# Altium PCB AMP_PCB.PcbDoc
Units mm, origin at the board's own origin, x right, y up, seen from the top; angles counter-clockwise.
Board outline 60.45 x 34.54 mm, 4 copper layers (Top Layer, VCC, GND, Bottom Layer), stack 1.57 mm thick; 46 components, 25 nets, 136 pads, 162 vias.
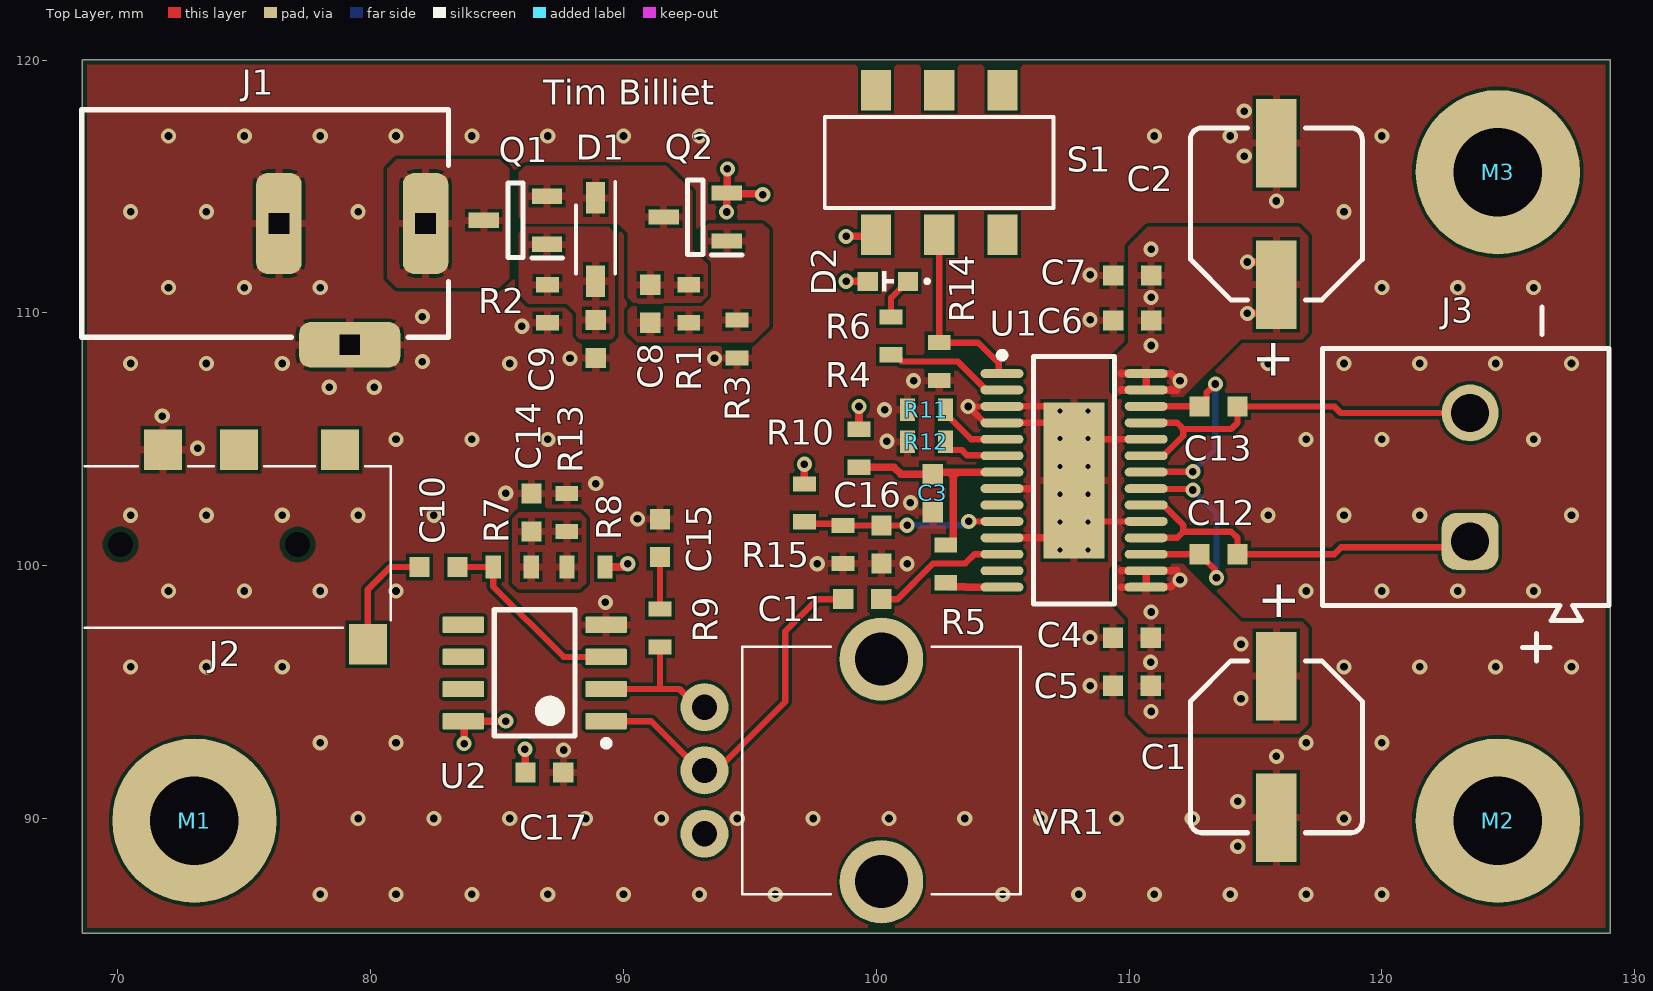
[diagram p0: Top Layer view]
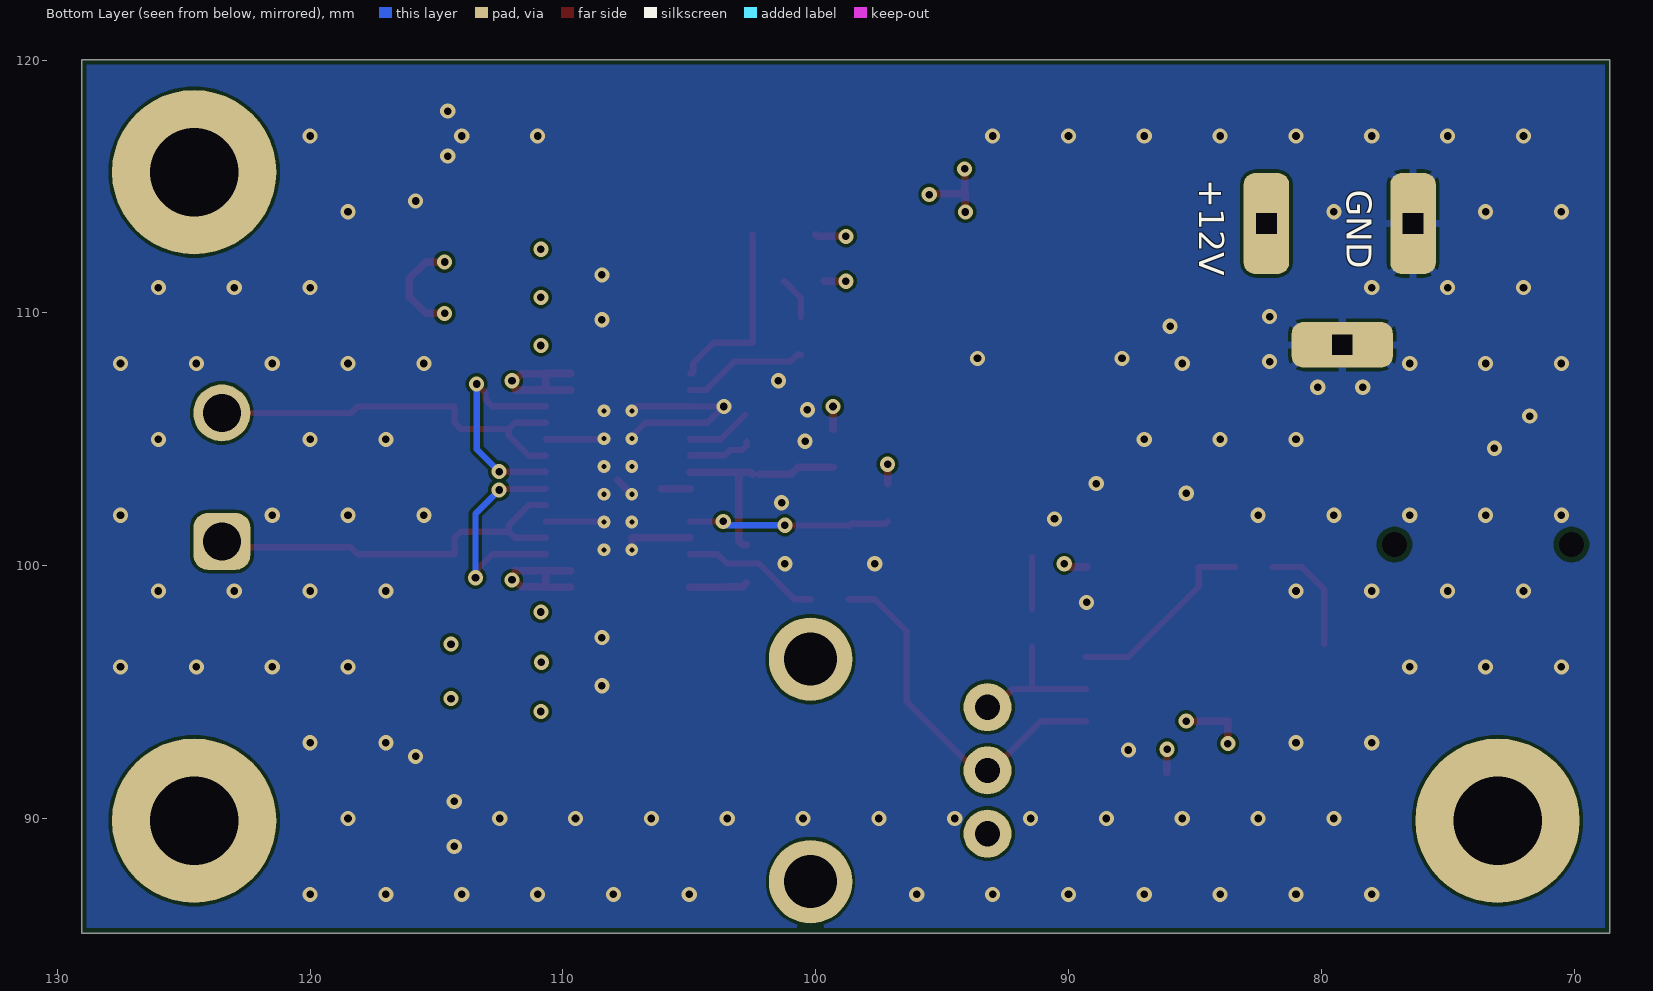
[diagram p1: Bottom Layer view, seen from below]
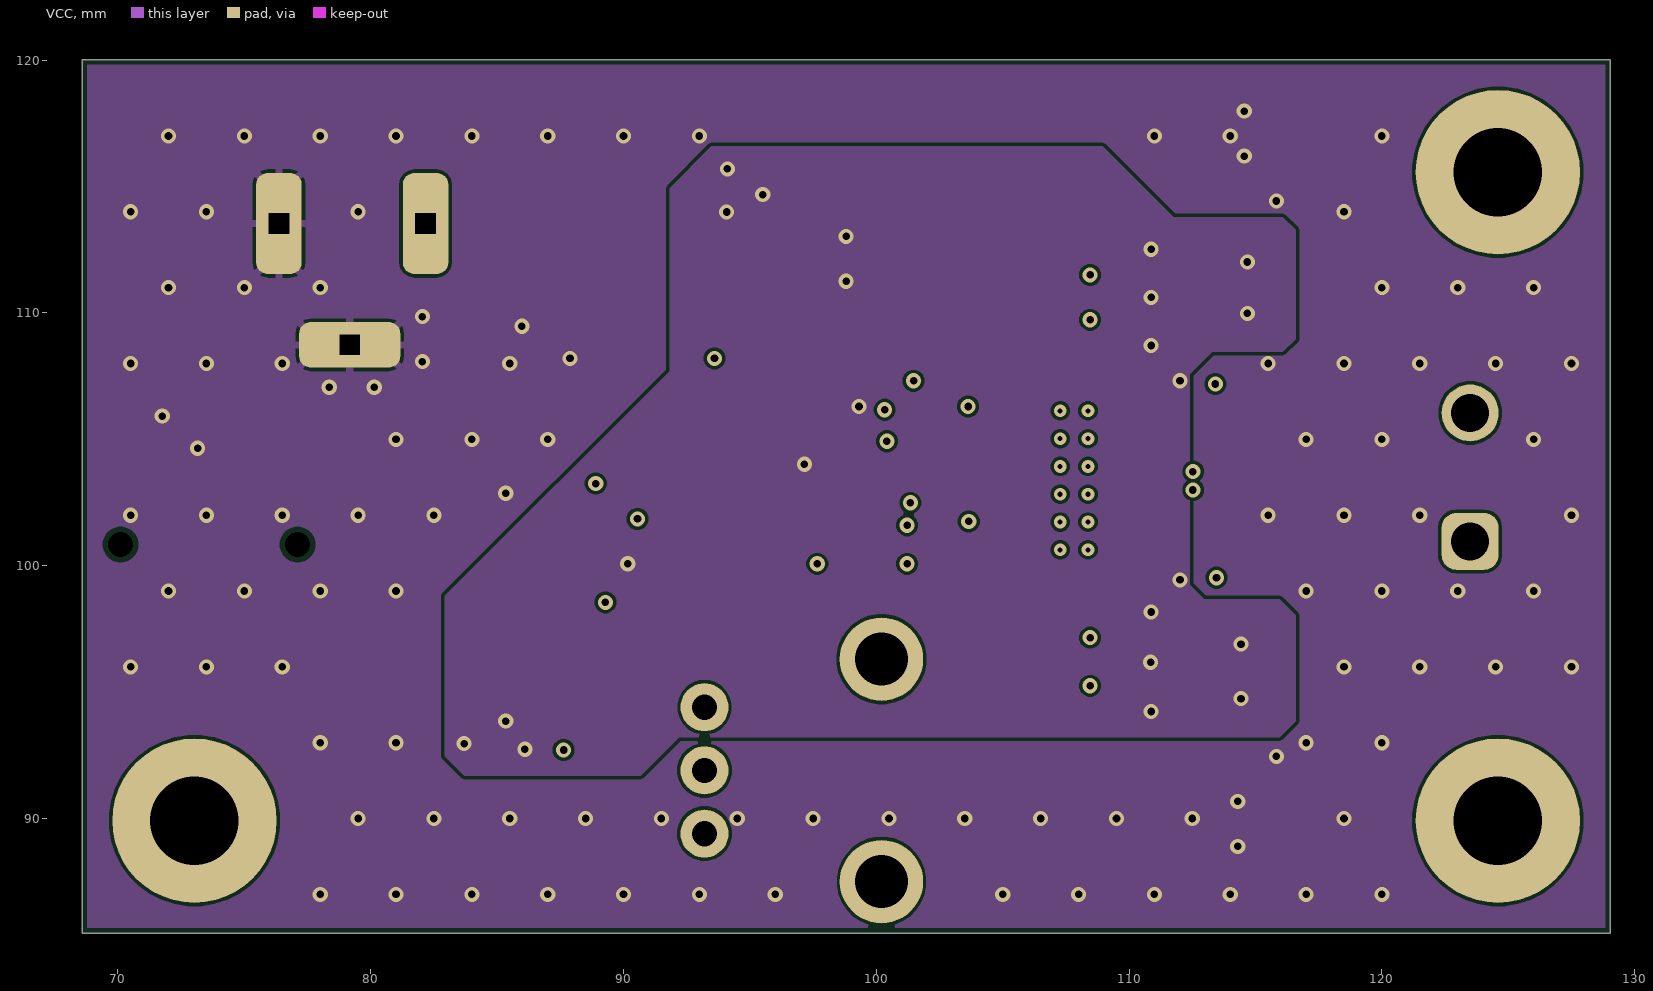
[diagram p2: VCC]
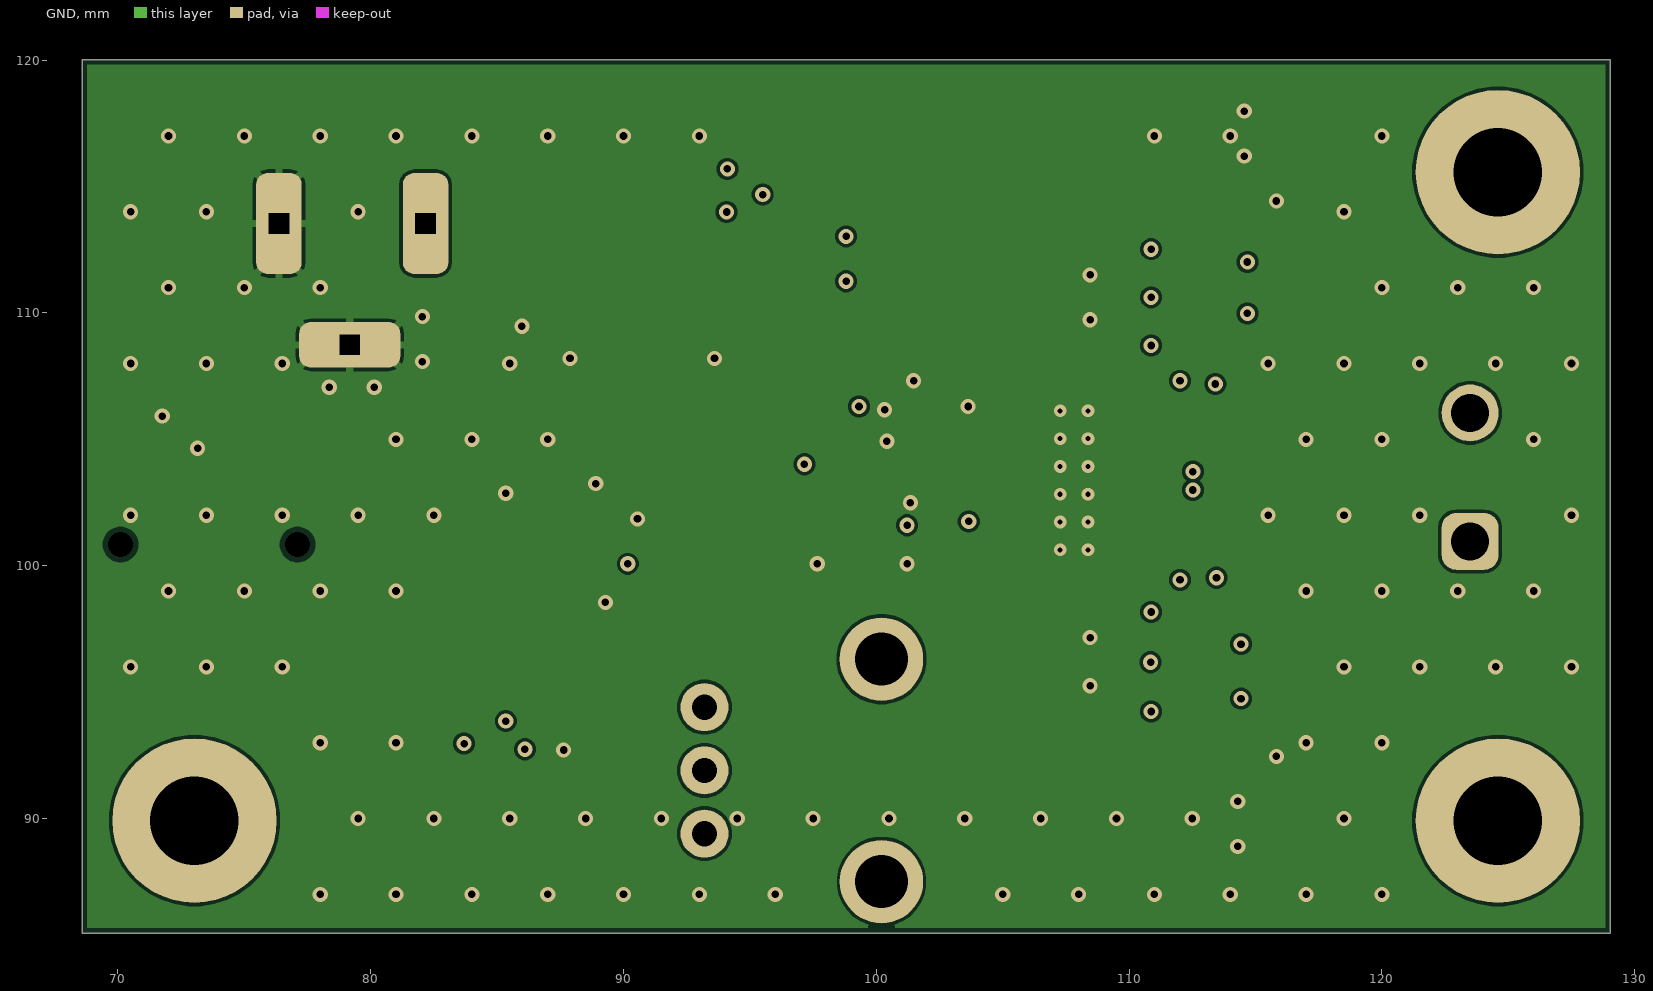
[diagram p3: GND]
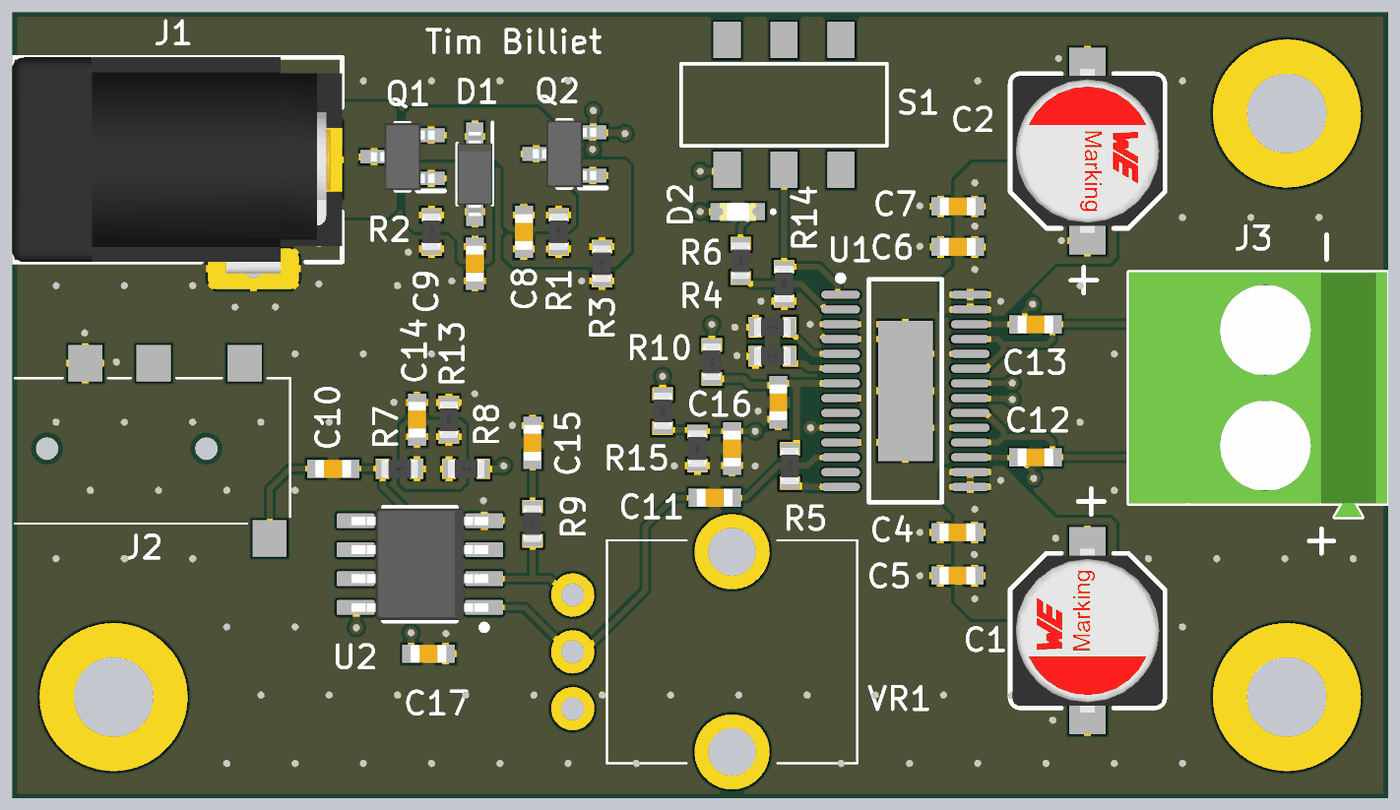
[diagram p4: 3D render of the assembled board from above, using the file's embedded part models]

## Layer stack, top to bottom
Top Solder: solder mask 0.0127, Solder Resist, Dk 3.8
Top Layer: signal copper 0.035
Dielectric 1: prepreg 0.2, 7628, Dk 4.6
VCC: signal copper 0.0175
Core: core 1.065, FR-4, Dk 4.5
GND: signal copper 0.0175
Dielectric 2: prepreg 0.2, 7628, Dk 4.6
Bottom Layer: signal copper 0.035
Bottom Solder: solder mask 0.0127, Solder Resist, Dk 3.8

## Board outline
68.58,85.471 68.58,120.015 129.032,120.015 129.032,85.471

## Design rules (kind name [scope] priority, off if disabled: settings)
BoardOutlineClearance [All] p1: gap=0.2 ignorepadtopadclearanceinfootprint=FALSE
Clearance [All] p1: gap=0.127 ignorepadtopadclearanceinfootprint=FALSE except(0.2: Arc-Hole Track-Hole SMDPad-Hole THPad-Hole Via-Hole Fill-Hole Poly-Hole Region-Hole Text-Hole)
ComponentClearance [All] p1: gap=0.127 collisioncheckmode=3 verticalgap=0.127 showdistances=TRUE
DiffPairsRouting [All] p1: maxlimit=0.254 minlimit=0.127 mostfreqgap=0.254 toplayer_prefgap=0.127 toplayer_minwidth=0.127 toplayer_maxwidth=25.4 toplayer_prefwidth=0.127 midlayer1_mingap=0.254 midlayer1_minwidth=0.381 midlayer1_maxwidth=0.381 midlayer1_prefwidth=0.381 midlayer2_mingap=0.254 midlayer2_minwidth=0.381 midlayer2_maxwidth=0.381 midlayer2_prefwidth=0.381 bottomlayer_prefgap=0.127 bottomlayer_minwidth=0.127 bottomlayer_maxwidth=25.4 bottomlayer_prefwidth=0.127 maxuncoupledlength=12.7
Height [All] p1: minheight=0 maxheight=1816.048 prefheight=12.7
HoleSize [All] p1: absolutevalues=TRUE maxlimit=6.3 minlimit=0.15 maxpercent=80.000 minpercent=20.000
HoleToHoleClearance [All] p1: gap=0.25 allowstackedmicrovias=FALSE
MinimumAnnularRing [All] p1: minimumring=0.075
MinimumSolderMaskSliver [All] p1: minsoldermaskwidth=0
PlaneClearance [All] p1: clearance=0.127
PlaneConnect PlaneConnectPowerPads [InPadClass('PowerPads')] p1: planeconnectstyle=Direct reliefexpansion=0.508 reliefentries=4 reliefconductorwidth=0.254 reliefairgap=0.254
PlaneConnect [All] p2: pad.planeconnectstyle=Relief pad.reliefexpansion=0.3 pad.reliefentries=4 pad.reliefconductorwidth=0.127 pad.reliefairgap=0.127 via.planeconnectstyle=Direct via.reliefexpansion=0.3 via.reliefentries=4 via.reliefconductorwidth=0.127 via.reliefairgap=0.127
PolygonConnect PolygonConnectPowerPads [All vs (InPadClass('PowerPads'))] p1: connectstyle=Direct reliefconductorwidth=0.254 reliefentries=4 polygonreliefangle="90 Angle" airgapwidth=0.254
PolygonConnect [All] p2: thpad.connectstyle=Relief thpad.reliefconductorwidth=0.3 thpad.reliefentries=4 thpad.polygonreliefangle="90 Angle" thpad.airgapwidth=0.127 thpad.conductorbypadedge=TRUE thpad.mindistance=0.381 thpad.enablemindistance=FALSE smdpad.connectstyle=Relief smdpad.reliefconductorwidth=0.3 smdpad.reliefentries=4 smdpad.polygonreliefangle="90 Angle" smdpad.airgapwidth=0.127 smdpad.conductorbypadedge=TRUE smdpad.mindistance=0.381 smdpad.enablemindistance=FALSE via.connectstyle=Direct via.reliefconductorwidth=0.127 via.reliefentries=4 via.polygonreliefangle="90 Angle" via.airgapwidth=0.127
RoutingVias [All] p1: holewidth=0.3 width=0.6 viastyle="Through Hole" minholewidth=0.3 minwidth=0.6 maxholewidth=0.6 maxwidth=6.6
SilkToSilkClearance [All] p1: silktosilkclearance=0
SilkToSolderMaskClearance [IsPad] p1: minsilkscreentomaskgap=0.127 clearancetoexposedcopper=TRUE
SolderMaskExpansion SolderMaskExpansionVia [isVia] p1: expansion=0.102 istentingtop=TRUE
SolderMaskExpansion [All] p2: expansion=0.075 istentingtop=FALSE useseparateexpansions=TRUE expansionbottom=0.075 istentingbottom=FALSE
SupplyNets "Schematic Supply Nets_2" [InNet('VCC')] p1: voltage=0.000
SupplyNets "Schematic Supply Nets" [InNet('AVCC')] p2: voltage=0.000
SupplyNets "Schematic Supply Nets_4" [InNet('GND')] p3: voltage=0.000
Width [All] p1: maxlimit=25.4 minlimit=0.127 preferedwidth=0.127 midlayer1_maxwidth=0.254 midlayer2_maxwidth=0.254 minimp=50.000000 maximp=50.000000 favimp=50.000000
20 further rules are at their usual default settings.

## Components (designator, comment, footprint, x,y, rotation, side; value= is the part's Value field where it differs from the comment)
C1 "ROQANG RVT1V101M0607" "WURTH D6.3X7.7MM" 115.824,92.837 r90 top value="100uF 35V"
C2 "ROQANG RVT1V101M0607" "WURTH D6.3X7.7MM" 115.824,113.919 r270 top value="100uF 35V"
C3 "Capacitor 1uF 0603" "WURTH 0603 CAPACITOR" 102.235,102.87 r90 top value=1uF
C4 "Capacitor 1nF 0603" "WURTH 0603 CAPACITOR" 110.109,97.155 r0 top value=1nF
C5 "Capacitor 100nF 0603 50V" "WURTH 0603 CAPACITOR" 110.109,95.25 r0 top value=100nF
C6 "Capacitor 1nF 0603" "WURTH 0603 CAPACITOR" 110.122,109.705 r0 top value=1nF
C7 "Capacitor 100nF 0603 50V" "WURTH 0603 CAPACITOR" 110.122,111.483 r0 top value=100nF
C8 "Capacitor 1uF 0603" "WURTH 0603 CAPACITOR" 91.059,110.363 r90 top value=1uF
C9 "Capacitor 15nF 0603" "WURTH 0603 CAPACITOR" 88.9,108.966 r90 top value=15nF
C10 "Capacitor 1uF 0603" "WURTH 0603 CAPACITOR" 82.677,99.949 r180 top value=1uF
C11 "Capacitor 1uF 0603" "WURTH 0603 CAPACITOR" 99.441,98.679 r180 top value=1uF
C12 "Capacitor 470nF 0603 50V" "WURTH 0603 CAPACITOR" 113.538,100.457 r0 top value=470nF
C13 "Capacitor 470nF 0603 50V" "WURTH 0603 CAPACITOR" 113.538,106.299 r0 top value=470nF
C14 "Capacitor 4.7uF 0603" "WURTH 0603 CAPACITOR" 86.36,102.108 r270 top value=4.7uF
C15 "Capacitor 1uF 0603" "WURTH 0603 CAPACITOR" 91.44,101.092 r90 top value=1uF
C16 "Capacitor 1uF 0603" "WURTH 0603 CAPACITOR" 100.203,100.838 r90 top value=1uF
C17 "Capacitor 100nF 0603 50V" "WURTH 0603 CAPACITOR" 86.868,91.821 r180 top value=100nF
D1 "BZT52B15V" SOD-123 88.9,112.903 r270 top
D2 "Red, 2V, 140°" "WURTH 0603 LED" 100.457,111.252 r180 top
J1 "694108301002" 694108301002 75.819,113.538 r270 top
J2 "SHOU HAN PJ-320D" "SHOU HAN PJ-320D" 68.484,100.738 r0 top
J3 "691236510002" 691236510002 123.317,103.505 r90 top
M1 "Mounting hole" "M3 hole"#1 73.025,90.805 r0 top
M2 "Mounting hole" "M3 hole"#2 124.206,91.948 r0 top
M3 "Mounting hole" "M3 hole"#3 123.952,115.57 r0 top
Q1 "AO3407" "UMW SOT23-3" 85.725,113.665 r180 top
Q2 "AO3407" "UMW SOT23-3" 92.837,113.792 r180 top
R1 "Resistor 27k 0603" "WURTH 0603 RESISTOR" 92.583,110.363 r90 top value=27k
R2 "Resistor 10k 0603" "WURTH 0603 RESISTOR" 86.995,110.363 r90 top value=10k
R3 "Resistor 2k2 0603" "WURTH 0603 RESISTOR" 94.488,108.966 r90 top value=2k2
R4 "Resistor 10R 0603" "WURTH 0603 RESISTOR" 99.314,104.648 r270 top value=10R
R5 "Resistor 100k 0603" "WURTH 0603 RESISTOR" 102.743,100.076 r270 top value=100k
R6 "Resistor 2k2 0603" "WURTH 0603 RESISTOR" 100.584,109.093 r90 top value=2k2
R7 "Resistor 220k 0603" "WURTH 0603 RESISTOR" 85.598,99.949 r180 top value=220k
R8 "Resistor 33k 0603" "WURTH 0603 RESISTOR" 88.519,99.949 r0 top value=33k
R9 "Resistor 2k2 0603" "WURTH 0603 RESISTOR" 91.44,97.536 r270 top value=2k2
R10 "Resistor 16k2 0603" "WURTH 0603 RESISTOR" 97.155,102.489 r90 top value=16k2
R11 "Resistor 0R 0603" "WURTH 0603 RESISTOR" 101.981,106.172 r0 top value=0R
R12 "Resistor 0R 0603" "WURTH 0603 RESISTOR" 101.981,104.902 r0 top value=0R
R13 "Resistor 33k 0603" "WURTH 0603 RESISTOR" 87.757,102.108 r270 top value=33k
R14 "Resistor 33k 0603" "WURTH 0603 RESISTOR" 102.489,108.077 r90 top value=33k
R15 "Resistor 2k2 0603" "WURTH 0603 RESISTOR" 98.679,100.838 r90 top value=2k2
S1 "MST22D18G2 125" "SHOU HAN MST22D18G2 125 SWITCH" 102.489,115.951 r180 top
U1 "TPA3111D1PWPR" TI-PWP28-5720X1950TP_N 107.823,103.378 r0 top
U2 "TL072CD" D0008A_M 86.487,95.758 r180 top
VR1 "ALPSALPINE RK09K11300DR" "ALPSALPINE RK09K11300DR" 93.203,91.903 r270 top value=10k

## Footprints (in the part's own frame and the unit in brackets; to place one, negate y for a bottom-side part, rotate by r counter-clockwise, add the part's x,y. Pads: shape width x height; smd on the part's side, far side on the other; paste and mask are expansions set on the pad)
691236510002 [mm] "Horizontal Cable Entry with Rising Cage Clamp, pitch 5.08mm, 02p"
  rrect50% 2.25x2.25 hole 1.5: 1(-2.54,-0.175)
  round 2.25 hole 1.5: 2(2.54,-0.175)
  silkscreen extent -5.68,-5.68 5.08,5.68, body extent -5.68,-5.67 5.08,5.68, height 18.1
694108301002 [mm] "DC Power Jack Right Angled(6.4)"
  rrect50% 4x1.8 hole 0.8 square: 1(0,6.35) 2(0,0.55)
  rrect50% 1.8x4 hole 0.8 square: 3(4.8,3.35)
  silkscreen extent -4.5,-7.25 4.5,7.25, body extent -4.5,-7.25 5,7.25, height 10.75
"ALPSALPINE RK09K11300DR" [mm] "10k vertical potentiometer"
  round 1.9 hole 1: 1(-2.5,0) 2(0,0) 3(2.5,0)
  round 3.3 hole 2.1: 4(-4.4,7) 5(4.4,7)
  silkscreen extent -4.9,1.5 4.9,12.5
D0008A_M [mm] "SOIC, 8-Leads, Body 5x4mm, Pitch 1.27mm, IPC Low Density"
  rrect15% 1.65x0.65 smd: 1(-2.825,1.905) 2(-2.825,0.635) 3(-2.825,-0.635) 4(-2.825,-1.905) 5(2.825,-1.905) 6(2.825,-0.635) 7(2.825,0.635) 8(2.825,1.905)
  silkscreen extent -2.95,-2.5 1.6,2.9, body extent -3,-2.45 3,2.45, height 1.63
"M3 hole"#1 [mm]
  round 6.5 hole 3.5: 1(0,-0.889)
"M3 hole"#2 [mm]
  round 6.5 hole 3.5: 1(0.381,-2.032)
"M3 hole"#3 [mm]
  round 6.5 hole 3.5: 1(0.635,0)
"SHOU HAN MST22D18G2 125 SWITCH" [mm]
  rect 1.2x1.6 smd: 1(-2.5,2.85) 2(0,2.85) 3(2.5,2.85) 4(-2.5,-2.85) 5(0,-2.85) 6(2.5,-2.85)
  silkscreen extent -4.52,-1.8 4.53,1.8
"SHOU HAN PJ-320D" [mm] "3.5mm jack"
  rect 1.5x1.6 smd: 1(11.4,-3.85) 2(10.3,3.85) 3(6.3,3.85) 4(3.3,3.85)
  round 0 hole 1 unplated: 14(1.62,0.1) 14(8.62,0.1)
  silkscreen extent 0.2,-3.2 12.3,3.2
SOD-123 [mm]
  rect 1.25x0.75 smd: 1(-1.65,0) 2(1.65,0)
  silkscreen extent -2.27,-0.77 1.35,0.77, body extent -1.85,-0.77 1.85,0.77, height 1.35
TI-PWP28-5720X1950TP_N [mm] "SOP, 28-Leads, Body 9.8x4.5mm, Pitch 0.65mm, Thermal Pad 6.17x2.4mm, IPC Medium Density"
  oval 1.7x0.35 smd: 1(-2.85,4.225) 2(-2.85,3.575) 3(-2.85,2.925) 4(-2.85,2.275) 5(-2.85,1.625) 6(-2.85,0.975) 7(-2.85,0.325) 8(-2.85,-0.325) 9(-2.85,-0.975) 10(-2.85,-1.625) 11(-2.85,-2.275) 12(-2.85,-2.925) 13(-2.85,-3.575) 14(-2.85,-4.225) 15(2.85,-4.225) 16(2.85,-3.575) 17(2.85,-2.925) 18(2.85,-2.275) 19(2.85,-1.625) 20(2.85,-0.975) 21(2.85,-0.325) 22(2.85,0.325) 23(2.85,0.975) 24(2.85,1.625) 25(2.85,2.275) 26(2.85,2.925) 27(2.85,3.575) 28(2.85,4.225)
  rect 2.4x6.17 smd: 29(0,0)
  silkscreen extent -2.97,-4.9 1.6,5.07, body extent -2.25,-4.9 2.25,4.9, height 1.2
"UMW SOT23-3" [mm]
  rect 1.2x0.6 smd: 1(-1.25,0.95) 2(-1.25,-0.95) 3(1.25,0)
  silkscreen extent -1.85,-1.48 0.3,1.5, body extent -1.4,-1.48 1.4,1.48, height 1.25
"WURTH 0603 CAPACITOR" [mm] "Ceramic Capacitors, body 1.6x0.8mm"
  rect 0.8x0.8 smd: 1(-0.75,0) 2(0.75,0)
  body extent -0.8,-0.4 0.8,0.4, height 0.8
"WURTH 0603 LED" [mm] "SMD Mono-color Chip LED, body 1.6x0.8mm"
  rect 0.8x0.75 smd: 1(-0.8,0) 2(0.8,0)
  silkscreen extent -1.63,-0.4 0.22,0.4, body extent -0.8,-0.4 0.8,0.4, height 0.42
"WURTH 0603 RESISTOR" [mm] "Fixed Thick Film, body 1.60 x 0.80 mm"
  rect 0.6x0.9 smd paste-0.028 mask+0.1: 1(-0.75,0) 2(0.75,0)
  body extent -0.8,-0.4 0.8,0.4, height 0.45
"WURTH D6.3X7.7MM" [mm] "Aluminum Hybrid Polymer Capacitor, SMT, body diameter 6.3mm"
  rect 3.5x1.6 smd: 1(2.8,0) 2(-2.8,0)
  silkscreen extent -3.4,-3.4 3.4,3.4, body extent -3.6,-3.3 3.6,3.3, height 7.75

## Part data
C1 C2: library part "100uF 35V SMD", "SMD,D6.3xL7.7mm"
D1: library part "YONGYUTAI BZT52B15"
D2: library part "LED RED 0603", "WL-SMCD Mono-color Chip LED Diffused, SMT, size 0603, Red, 2V, 140°", Case/Size Code=0603, Emitting Color=Red, Forward Voltage=2V, Manufacturer="Wurth Elektronik", Manufacturer Part Number=150060RS55040, Operating Temperature Max=85°C, Operating Temperature Min=-40°C, Category="Signal LEDs", Chip Technology=AlInGaP, ComponentLink1Description="Website Link", ComponentLink1URL=https://www.we-online.com/redexpert/article/150060RS55040?ad, ComponentLink2Description="Datasheet Link", ComponentLink2URL=https://www.we-online.com/redexpert/spec/150060RS55040?ad, Dominant Wavelength=624nm, Height=0.4mm, Length=1.6mm, Luminous Intensity=90mcd, Match Code=WL-SMCD, Mount="Surface Mount", Packaging="Tape and Reel", Peak Wavelength=632nm, Viewing Angle=140°, Width=0.8mm
J1: library part CMP-1502-00190-4, "DC Power Jack Connector WR-DC, Male, Right Angled, THT, 5 A, 24 V", Color=Black, Current Rating=5A, Flammability Rating="UL94 V-0", Insulation Resistance=100MΩ, Max Operating Temperature=85°C, Min Operating Temperature=-40°C, Operating Supply Voltage=24V, Voltage Rating=30V, Connector Type=Power, Contact Gender=Female, Contact Material="Gold, Tin", Contact Plating=Tin, Gender=Male, Height=11mm, Housing Material=Polyamide, Mount="Through Hole", Number of Contacts=3, Packaging=Bulk, REACH SVHC=Unknown, RoHS=Compliant, Shielding=Unshielded, Termination="Through Hole"
J2: library part "3.5mm headphone jack smd"
J3: library part CMP-1502-02613-3, "Terminal Block, Wtb, 2Way, 30-12Awg Rohs Compliant: Yes", Current Rating=20A, Max Operating Temperature=120°C, Min Operating Temperature=-30°C, Voltage Rating=300V, Height=18.1mm, Lead Pitch=5.08mm, Number of Contacts=2, Number of Pins=2, Number of Rows=1, Packaging=Box, RoHS=Compliant
Q1 Q2: library part "UMW AO3407A", "MOSFET (P-Channel)", Arrow Part Number=AO3407A, Manufacturer_Name="Alpha & Omega Semiconductors", Arrow Price/Stock=https://www.arrow.com/en/products/ao3407a/alpha-and-omega-semiconductor?region=nac, Datasheet Link=http://www.aosmd.com/pdfs/datasheet/ao3407a.pdf, Height=1.25mm, Manufacturer_Part_Number=AO3407A
S1: library part "SHOU HAN MST22D18G2 125"
U1: library part CMP-0994-00250-2, "None", Case/Package=HTSSOP, Max Operating Temperature=85°C, Max Output Power=10W, Max Supply Voltage=26V, Min Operating Temperature=-40°C, Min Supply Voltage=8V, Nominal Supply Current=40mA, Package Quantity=2000, Power Dissipation=4.98W, Voltage Gain=36dB, Gain=37dB, Lead Free="Lead Free", Load Impedance=8R, Number of Channels=1, Number of Pins=28, Output Power=10W, Packaging="Tape and Reel", Radiation Hardening=No, REACH SVHC="No SVHC", RoHS Compliant=Yes, Series=SpeakerGuard™, Supply Current=40mA
U2: library part CMP-0017-00467-2, "Dual Low-Noise JFET-Input General-Purpose Operational Amplifier, 7 to 36 V, 0 to 70 degC, 8-pin SOIC (D8), Green (RoHS & no Sb/Br)", Manufacturer="Texas Instruments", Rating=Catalog, Total Supply Voltage(Max)(+5V is 5, +/-5V is 10)=36, Total Supply Voltage(Min)(+5V is 5, +/-5V is 10)=7, CMRR(Min)(dB)=70, Code_JEDEC=MS-012, ComponentLink1Description="Manufacturer URL", ComponentLink1URL=http://www.ti.com/, ComponentLink2Description=Datasheet, ComponentLink2URL=http://www.ti.com/lit/ds/symlink/tl072.pdf, ComponentLink3Description="Package Specification", ComponentLink3URL=http://www.ti.com/litv/pdf/msoi002j, DatasheetVersion=SLOS080J, Eco-Plan="Green (RoHS & no Sb/Br)", GBW(Typ)(MHz)=3, IIB(Max)(pA)=200, Iq per channel(Max)(mA)=2.5, Mounting Technology="Surface Mount", Number of Channels=2, Offset Drift(Typ)(uV/C)=18, PackageDescription="8-Pin Plastic Small Outline, Body 4.9 x 3.9 mm, Pitch 1.27 mm", PackageReference=D0008A, PackageVersion="4040047-3/M, 06/2011", PartNumber=TL072CD, Slew Rate(Typ)(V/us)=13, Sub Family="General Purpose Amplifier, High Supply Voltage Amplifier (>=30V)", Vio (25C)(Max)(mV)=10, Vn at 1kHz(Typ)(nV/rtHz)=18
VR1: library part "Potentiometer 10k"

## Via types
v1: diameter 0.6, hole 0.3, Top Layer to Bottom Layer, tented both sides, 150 vias
v2: diameter 0.5, hole 0.2, Top Layer to Bottom Layer, tented both sides, 12 vias

## Nets (pads, with @x,y where several pads share a name; then routed paths per layer and width w, separated by ;. In a path a pad name is that pad's centre, name@x,y a point inside that pad or via, vN(x,y) a via of type N, cw(c..) or ccw(c..) an arc to the next point about the centre after c; other vN are vias at no path point)
AVCC: C3.2 R4.2 R5.1 U1.7 | length 8.9
  Top Layer w0.3: R4.2 100.699,103.898 100.977,103.62 C3.2 ; C3.2@102.489,103.62 102.572,103.703 102.876,103.703 ; R5.1 102.893,100.826 103.043,100.976 103.043,103.536 ; U1.7 103.21,103.703 ; 102.876,103.703 103.21,103.703 ; 102.876,103.703 103.043,103.536 ; 103.043,103.536 103.21,103.703
GND: C1.2 C2.2 C3.1 C4.1 C5.1 C6.1 C7.1 C9.1 C14.1 C15.2 C16.1 C17.1 J1.2 J1.3 J2.4 R2.1 R3.1 R11.1 R12.1 R13.1 R14.1 R15.1 U1.3 U1.4 U1.8 U1.11 U1.19 U1.24 U1.29 U2.4 | length 17.3
  Top Layer w0.25: U1.3@104.973,106.299 U1.3 ; v2(107.273,100.628) U1.29@107.273,101.103 ; v2(107.273,105.028) 107.273,105.128 106.748,105.653 U1.4 104.288,105.653 103.642,106.299 v1(103.632,106.299) 103.634,106.301 104.971,106.301 U1.3 ; v2(107.273,106.128) 107.098,106.303 U1.3 ; v2(108.373,101.728) 108.398,101.753 U1.19 ; v2(108.373,105.028) 108.398,105.003 U1.24
  Top Layer w0.3: U1.11 U1.29@107.273,101.103 ; U1.8 106.116,103.053 ; U1.29@107.273,102.829 U1.29
  other v1: 78,87 81,87 84,87 87,87 90,87 93,87 96,87 105,87 108,87 111,87 114,87 117,87 120,87 114.3,88.9 79.5,90 82.5,90 85.5,90 88.5,90 91.5,90 94.5,90 97.5,90 100.5,90 103.5,90 106.5,90 109.5,90 112.5,90 118.5,90 114.3,90.678 115.824,92.456 87.63,92.71 78,93 81,93 117,93 120,93 108.458,95.25 70.5,96 73.5,96 76.5,96 118.5,96 121.5,96 124.5,96 127.5,96 108.458,97.155 89.281,98.552 72,99 75,99 78,99 81,99 117,99 120,99 123,99 126,99 97.663,100.076 101.219,100.076 90.551,101.854 70.5,102 73.5,102 76.5,102 79.5,102 82.5,102 115.5,102 118.5,102 121.5,102 127.5,102 101.346,102.489 85.344,102.87 88.9,103.251 73.152,104.648 100.418,104.925 81,105 84,105 87,105 117,105 120,105 126,105 71.755,105.918 100.33,106.172 78.359,107.061 80.137,107.061 101.473,107.315 70.5,108 73.5,108 76.5,108 85.5,108 115.5,108 118.5,108 121.5,108 124.5,108 127.5,108 82.042,108.077 87.884,108.204 93.599,108.204 85.979,109.474 108.458,109.728 82.042,109.855 72,111 75,111 78,111 120,111 123,111 126,111 108.458,111.506 70.5,114 73.5,114 79.5,114 118.5,114 115.824,114.427 114.554,116.205 72,117 75,117 78,117 81,117 84,117 87,117 90,117 93,117 111,117 114,117 120,117 114.554,117.983
  other v2: 108.373,100.628 107.273,101.728 107.273,102.828 108.373,102.828 107.273,103.928 108.373,103.928 108.373,106.128
IN_P: C11.1 U1.12 | length 5.5
  Top Layer w0.25: C11.1 100.838,98.679 102.251,100.092 103.521,100.092 103.882,100.453 U1.12
NetC8_1: C8.1 Q2.1 R1.1 R3.2
NetC8_2: C8.2 D1.1 Q1.2 Q2.3 R1.2
NetC9_2: C9.2 D1.2 Q1.1 R2.2
NetC10_1: C10.1 R7.2 U2.3 | length 7.8
  Top Layer w0.25: C10.1 R7.2 84.848,99.175 87.63,96.393 U2.3
NetC10_2: C10.2 J2.1 | length 4.6
  Top Layer w0.25: J2.1 79.884,99.061 80.772,99.949 C10.2
NetC11_2: C11.2 U2.1 VR1.2 | length 14.8
  Top Layer w0.25: U2.1 91.089,93.853 93.203,91.739 93.517,91.739 96.393,94.615 96.393,97.409 97.663,98.679 C11.2
NetC12_1: C12.1 U1.17 U1.21 | length 9
  Top Layer w0.25: U1.17 112.784,100.453 C12.1 ; U1.21 110.692,103.034 112.485,103.034 v1(112.522,102.997) ; C12.1@112.792,100.453 113.39,99.855 113.39,99.593 v1(113.457,99.526)
  Bottom Layer w0.25: v1(112.522,102.997) 113.457,102.062 v1(113.457,99.526)
NetC12_2: C12.2 J3.1 U1.18 U1.20 | length 15.9
  Top Layer w0.25: U1.18 110.679,101.109 111.904,101.109 112.141,101.346 ; U1.20 111.348,102.403 112.141,101.61 112.141,101.346 ; J3.1 123.259,100.732 118.385,100.732 118.11,100.457 C12.2 114.288,101.104 114.046,101.346 112.141,101.346
NetC13_1: C13.1 U1.22 U1.26 | length 9
  Top Layer w0.25: U1.22 110.683,103.713 112.511,103.713 v1(112.522,103.724) ; U1.26 112.784,106.303 C13.1 113.063,106.574 113.063,106.84 v1(113.411,107.188)
  Bottom Layer w0.25: v1(112.522,103.724) 113.411,104.613 v1(113.411,107.188)
NetC13_2: C13.2 J3.2 U1.23 U1.25 | length 15.8
  Top Layer w0.25: U1.23 111.348,104.353 112.141,105.146 112.141,105.41 ; U1.25 111.898,105.653 112.141,105.41 ; J3.2 118.364,106.045 118.11,106.299 C13.2 114.288,105.652 114.046,105.41 112.141,105.41
NetC14_2: C14.2 R7.1 R8.1 R13.2
NetC15_1: C15.1 R9.1 | length 2.1
  Top Layer w0.25: R9.1 C15.1
NetC16_2: C16.2 R10.1 R15.2 U1.10 | length 7.9
  Top Layer w0.25: R10.1 97.23,101.663 98.604,101.663 R15.2 98.685,101.594 101.213,101.594 v1(101.219,101.6) ; v1(103.658,101.753) U1.10
  Bottom Layer w0.25: v1(101.219,101.6) 103.505,101.6 v1(103.658,101.753)
NetD2_1: D2.1 R6.2 | length 1.7
  Top Layer w0.25: R6.2 100.584,110.604 101.232,111.252 D2.1
NetJ1_1: J1.1 Q1.3
NetR5_2: R5.2 U1.14 | length 2.3
  Top Layer w0.3: R5.2 102.893,99.176 103.516,99.176 103.539,99.153 U1.14
NetR6_1: R6.1 U1.2 | length 5
  Top Layer w0.25: R6.1 100.734,108.343 101,108.077 103.22,108.077 104.248,107.049 104.248,107.03 104.325,106.953 U1.2
NetR9_2: R9.2 U2.2 VR1.1 | length 5.9
  Top Layer w0.25: U2.2 91.44,95.123 ; R9.2 91.44,95.123 ; VR1.1@93.203,94.239 93.097,94.239 92.213,95.123 91.44,95.123
NetR11_2: R11.2 U1.5 | length 2.6
  Top Layer w0.25: R11.2@102.784,105.971 103.748,105.008 104.968,105.008 U1.5
NetR12_2: R12.2 U1.6 | length 2.6
  Top Layer w0.25: R12.2 102.731,104.752 102.906,104.577 103.373,104.577 103.579,104.371 104.955,104.371 U1.6
SD: R14.2 S1.2 U1.1 | length 7.5
  Top Layer w0.25: S1.2 R14.2 104.025,108.827 104.845,108.007 104.845,107.649 104.892,107.603 U1.1
VCC: C1.1 C2.1 C4.2 C5.2 C6.2 C7.2 C17.2 D2.2 Q2.2 R4.1 R8.2 R10.2 S1.3 U1.15 U1.16 U1.27 U1.28 U2.8 | length 26.4
  Top Layer w0.3: v1(83.693,92.964) 83.693,93.822 U2.8 v1(85.344,93.853) ; v1(86.1,92.74) 86.109,92.731 86.109,91.83 C17.2 ; R8.2 89.962,99.949 90.089,100.076 v1(90.17,100.076) ; v1(94.078,113.993) 94.078,114.733 Q2.2 ; v1(94.107,115.697) 94.107,114.762 Q2.2 ; v1(95.504,114.681) 95.473,114.712 94.118,114.712 Q2.2 ; R10.2 v1(97.155,104.013) ; v1(98.806,111.252) D2.2 ; v1(98.806,113.03) 99.918,113.03 S1.3 ; R4.1 v1(99.314,106.299) ; 109.69,99.153 U1.15 ; 109.69,99.803 U1.16 ; 109.69,106.953 U1.27 U1.27@110.696,106.953 ; 109.69,107.603 U1.28 ; U1.27@111.056,106.953 U1.27@110.696,106.953 ; 111.887,99.822 111.868,99.803 U1.16 ; 111.887,106.934 111.868,106.953 U1.27@110.696,106.953 ; v1(112.014,99.441) 111.933,99.441 111.654,99.163 110.683,99.163 U1.15 ; v1(112.014,107.315) 111.933,107.315 111.654,107.593 110.683,107.593 U1.28 ; v1(114.681,109.982) 115.428,109.982 116.078,110.632 116.078,111.364 115.428,112.014 v1(114.681,112.014) ; U1.15 U1.16 ; U1.28 110.673,106.976 U1.27@110.696,106.953
  other v1: 110.871,94.234 114.427,94.742 110.849,96.182 114.427,96.901 110.871,98.171 110.871,108.712 110.871,110.617 110.871,112.522
pads on no net: J2.2 J2.3 J2.14 M1.1 M2.1 M3.1 S1.1 S1.4 S1.5 S1.6 U1.9 U1.13 U2.5 U2.6 U2.7 VR1.3 VR1.4 VR1.5

## Polygon pours and split planes (outlines as drawn)
GND on Top Layer "NONET_L-01_P-001" (solid, pour order 12): 68.58,120.015 129.032,120.015 129.032,85.471 68.58,85.471
VCC on Top Layer "NONET_L-01_P-001" (solid, pour order 1): 117.094,113.03 117.094,109.22 116.84,108.966 114.427,108.966 112.141,106.68 109.601,106.68 109.347,106.934 109.347,108.204 109.972,108.829 109.972,112.639 110.744,113.411 116.713,113.411
VCC on Top Layer "NONET_L-01_P-001" (solid, pour order 2): 117.094,93.726 117.094,97.536 116.84,97.79 114.427,97.79 112.141,100.076 109.601,100.076 109.347,99.822 109.347,98.552 109.972,97.927 109.972,94.117 110.744,93.345 116.713,93.345
NetC8_1 on Top Layer "NONET_L-01_P-001" (solid, pour order 3): 90.551,108.839 95.123,108.839 95.758,109.474 95.758,113.284 95.504,113.538 93.345,113.538 93.091,113.284 93.091,112.395 93.472,112.014 93.472,110.617 93.112,110.257 90.318,110.257 90.17,110.109 90.17,109.22
NetC8_2 on Top Layer "NONET_L-01_P-001" (solid, pour order 4): 91.694,115.824 92.71,114.808 92.71,112.522 93.472,111.76 93.472,110.617 93.218,110.363 90.424,110.363 90.17,110.617 90.17,113.157 89.789,113.538 86.106,113.538 85.852,113.792 85.852,115.57 86.106,115.824
NetC9_2 on Top Layer "NONET_L-01_P-001" (solid, pour order 6): 86.106,113.411 85.852,113.157 85.852,110.744 86.233,110.363 87.757,110.363 88.138,109.982 88.138,109.093 88.265,108.966 89.535,108.966 89.662,109.093 89.662,113.157 89.408,113.411
NetJ1_1 on Top Layer "NONET_L-01_P-001" (solid, pour order 10): 85.09,116.078 81.026,116.078 80.645,115.697 80.645,111.379 81.026,110.998 85.09,110.998 85.471,111.379 85.471,115.697
NetC14_2 on Top Layer "NONET_L-01_P-001" (solid, pour order 11): 85.852,102.108 85.598,101.854 85.598,99.314 85.852,99.06 88.265,99.06 88.519,99.314 88.519,101.854 88.265,102.108
GND on GND "NONET_L-01_P-001" (solid, pour order 9): 68.58,120.015 129.032,120.015 129.032,85.471 68.58,85.471
VCC on VCC "NONET_L-01_P-001" (solid, pour order 5): 115.951,93.218 92.202,93.218 90.678,91.694 83.693,91.694 82.931,92.456 82.931,98.806 91.821,107.696 91.821,114.935 93.472,116.586 108.966,116.586 111.76,113.792 116.078,113.792 116.586,113.284 116.586,108.966 116.078,108.458 113.284,108.458 112.395,107.569 112.395,99.254 112.97,98.679 115.951,98.679 116.586,98.044 116.586,93.853
GND on VCC "NONET_L-01_P-001" (solid, pour order 8): 68.58,120.015 129.032,120.015 129.032,85.471 68.58,85.471
GND on Bottom Layer "NONET_L-01_P-001" (solid, pour order 7): 68.58,120.015 129.032,120.015 129.032,85.471 68.58,85.471

## Silkscreen, mask and mechanical layers (free items; w line width, h text height)
Top Overlay:
  lines w0.2: 125.569,96.774 126.653,96.774 ; 126.111,96.232 126.111,97.316 ; 126.334,109.153 126.334,110.236
  text "Tim Billiet" at 86.819,118.245 h1
Bottom Overlay:
  text "+12V" at 84.828,115.287 h1 r90
  text "GND" at 78.986,114.871 h1 r90
Mechanical 1:
  the board outline again, w0.1

## Text inside footprints (layer, text, board x,y; h text height)
C1: Top Overlay "+" at 116.574,97.737 h1.5 r90
C2: Top Overlay "+" at 115.074,109.019 h1.5 r270